# Altium PCB PCB1old.PcbDoc
Units mil, origin at the board's own origin, x right, y up, seen from the top; angles counter-clockwise.
Board outline 6000 x 4000 mil, 2 copper layers (Top Layer, Bottom Layer); 11 components, 71 nets, 147 pads, 0 vias.
Unrouted connection lines stored in the file: 7.
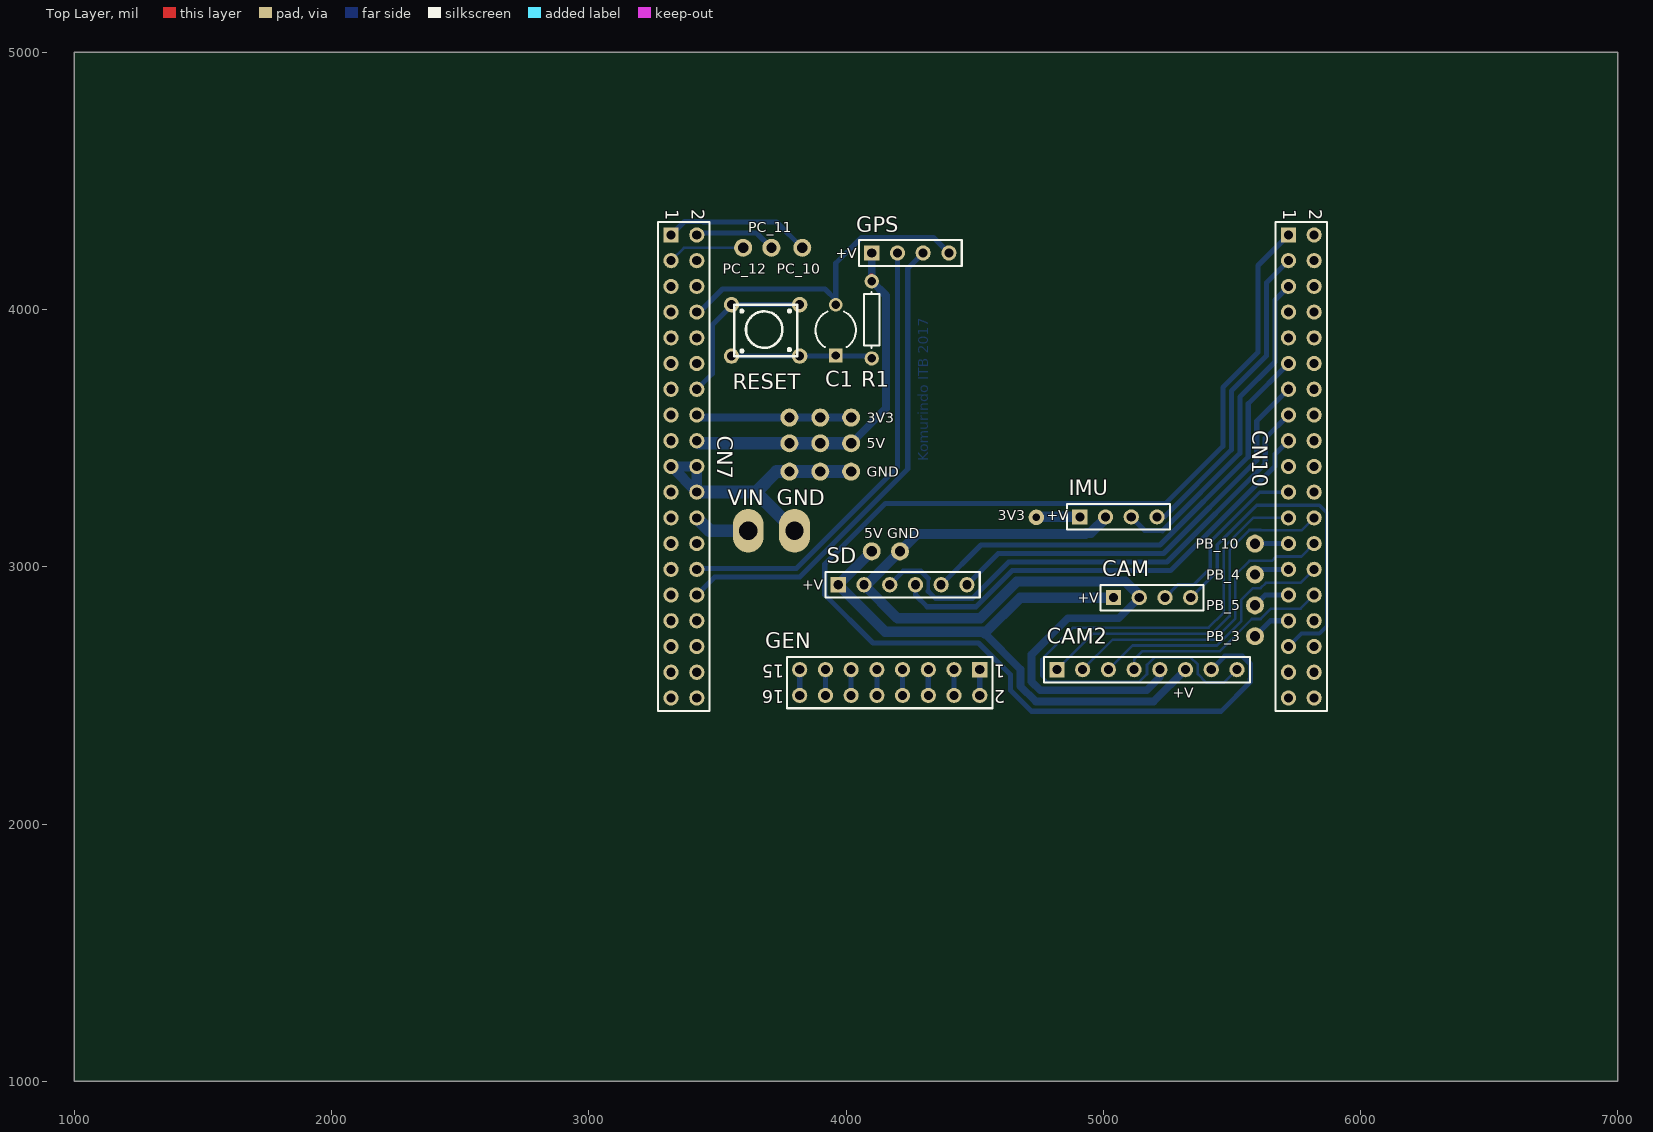
[diagram p0: Top Layer view]
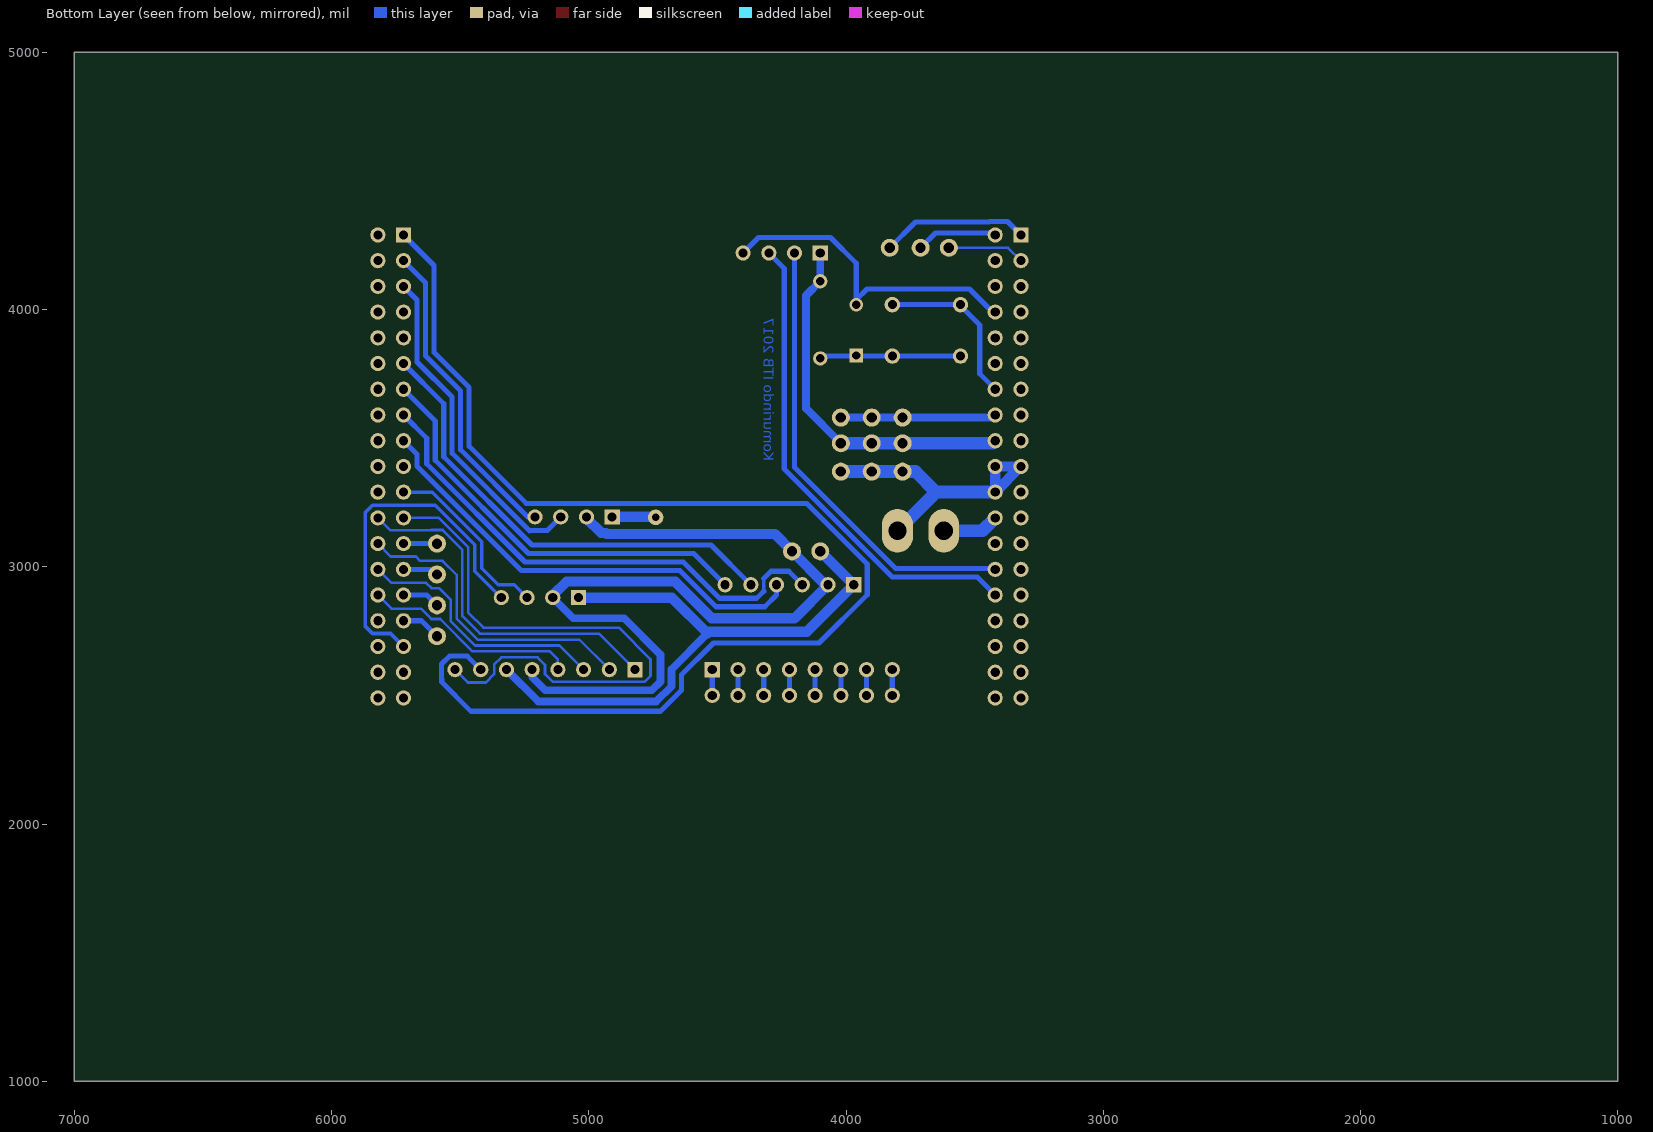
[diagram p1: Bottom Layer view, seen from below]

## Layer stack, top to bottom
Top Solder: solder mask 0.4, Solder Resist, Dk 3.5
Top Layer: signal copper 1.4
Dielectric 1: dielectric 12.6, FR-4, Dk 4.8
Bottom Layer: signal copper 1.4
Bottom Solder: solder mask 0.4, Solder Resist, Dk 3.5

## Board outline
1000,1000 7000,1000 7000,5000 1000,5000

## Design rules (kind name [scope] priority, off if disabled: settings)
Clearance [All] p1: gap=13
PolygonConnect [All] p1: connectstyle=Relief reliefconductorwidth=10 reliefentries=4 polygonreliefangle="90 Angle" airgapwidth=10
RoomDefinition Sheet1 [InComponentClass('Sheet1')] p1: confinementstyle=ConfineIn formatcopy=TRUE lockcomponents=FALSE outline 3190,2390 5940,2390 5940,4430 3190,4430
RoutingVias [All] p1: holewidth=28 width=50 viastyle="Through Hole" minholewidth=28 minwidth=50 maxholewidth=28 maxwidth=50
SolderMaskExpansion [All] p1: expansion=4
Width [All] p1: maxlimit=50 minlimit=10 preferedwidth=20 minimp=50.000000 maximp=50.000000 favimp=50.000000
30 further rules are at their usual default settings.

## Components (designator, comment, footprint, x,y, rotation, side; value= is the part's Value field where it differs from the comment)
C1 "Cap2" CAPR5-4X5 3960,3920 r90 top
CAM "Header 4" HDR1X4 5040,2880 r0 top
CAM2 "Header 8" HDR1X8 4820,2600 r0 top
CN7 "Header 19X2" HDR2X19 3320,4290 r270 top
CN10 "Header 19X2" HDR2X19 5720,4290 r270 top
GEN "Header 8X2" HDR2X8 4520,2600 r180 top
GPS "Header 4" HDR1X4 4100,4220 r0 top
IMU "Header 4" HDR1X4 4909,3194 r0 top
R1 "Res1" AXIAL-0.3 4100,3960 r90 top
RESET "pushbutton" pushbutton 4120,3920 r0 top
SD "Header 6" HDR1X6 3970,2930 r0 top

## Footprints (in the part's own frame and the unit in brackets; to place one, negate y for a bottom-side part, rotate by r counter-clockwise, add the part's x,y. Pads: shape width x height; smd on the part's side, far side on the other; paste and mask are expansions set on the pad)
AXIAL-0.3 [mm] "Axial Device, Thru-Hole; 2 Leads; 0.3 in Pin Spacing"
  round 1.4 hole 0.85: 1(-3.81,0) 2(3.81,0)
  silkscreen extent -2.77,-0.76 2.77,0.76
CAPR5-4X5 [mm] "Capacitor; 2 Leads"
  rect 1.35x1.35 hole 0.8: 1(-2.5,0)
  round 1.35 hole 0.8: 2(2.5,0)
  silkscreen extent -1.69,-2 1.82,2
HDR1X4 [mm] "Connector; Header; 4 Position"
  rect 1.5x1.5 hole 0.9: 1(0,0)
  round 1.5 hole 0.9: 2(2.54,0) 3(5.08,0) 4(7.62,0)
  silkscreen extent -1.27,-1.27 8.89,1.27
HDR1X6 [mm] "Connector; Header; 6 Position"
  rect 1.5x1.5 hole 0.9: 1(0,0)
  round 1.5 hole 0.9: 2(2.54,0) 3(5.08,0) 4(7.62,0) 5(10.16,0) 6(12.7,0)
  silkscreen extent -1.27,-1.27 13.97,1.27
HDR1X8 [mm] "Connector; Header; 8 Position"
  rect 1.5x1.5 hole 0.9: 1(0,0)
  round 1.5 hole 0.9: 2(2.54,0) 3(5.08,0) 4(7.62,0) 5(10.16,0) 6(12.7,0) 7(15.24,0) 8(17.78,0)
  silkscreen extent -1.27,-1.27 19.05,1.27
HDR2X8 [mm] "Connector; Header; 8x2 Position"
  rect 1.5x1.5 hole 0.9: 1(0,0)
  round 1.5 hole 0.9: 2(0,2.54) 3(2.54,0) 4(2.54,2.54) 5(5.08,0) 6(5.08,2.54) 7(7.62,0) 8(7.62,2.54) 9(10.16,0) 10(10.16,2.54) 11(12.7,0) 12(12.7,2.54) 13(15.24,0) 14(15.24,2.54) 15(17.78,0) 16(17.78,2.54)
  silkscreen extent -1.27,-1.27 19.05,3.81
HDR2X19 [mm] "Connector; Header; 19x2 Position"
  rect 1.5x1.5 hole 0.9: 1(0,0)
  round 1.5 hole 0.9: 2(0,2.54) 3(2.54,0) 4(2.54,2.54) 5(5.08,0) 6(5.08,2.54) 7(7.62,0) 8(7.62,2.54) 9(10.16,0) 10(10.16,2.54) 11(12.7,0) 12(12.7,2.54) 13(15.24,0) 14(15.24,2.54) 15(17.78,0) 16(17.78,2.54) 17(20.32,0) 18(20.32,2.54) 19(22.86,0) 20(22.86,2.54) 21(25.4,0) 22(25.4,2.54) 23(27.94,0) 24(27.94,2.54) 25(30.48,0) 26(30.48,2.54) 27(33.02,0) 28(33.02,2.54) 29(35.56,0) 30(35.56,2.54) 31(38.1,0) 32(38.1,2.54) 33(40.64,0) 34(40.64,2.54) 35(43.18,0) 36(43.18,2.54) 37(45.72,0) 38(45.72,2.54)
  silkscreen extent -1.27,-1.27 46.99,3.81
pushbutton [mil]
  round 60 hole 35: 1(-565,-101) 1(-300,-101) 2(-565,99) 2(-300,99)
  silkscreen extent -555,-101 -310,99

## Part data
C1: "Capacitor"
CAM GPS IMU: "Header, 4-Pin"
CAM2: "Header, 8-Pin"
CN7 CN10: "Header, 19-Pin, Dual row"
GEN: "Header, 8-Pin, Dual row"
R1: "Resistor"
SD: "Header, 6-Pin"

## Free pads (board coordinates)
  oval 120x170 hole 70: 0(3800,3140) 1(3620,3140)
  round 70 hole 40: 2(3900,3480) 3(3900,3370) 4(3900,3580) 5(5590,2730) 6(5590,2970) 7(5590,2850) 8(5590,3090) 9(3600,4240) 10(4020,3580) 11(4020,3480) 12(4020,3370) 13(3780,3370) 14(3780,3480) 15(3780,3580) 18(4100,3060) 19(4210,3060) 22(3710,4240) 23(3830,4240)
  round 60 hole 30: 21(4740,3192)

## Nets (pads, with @x,y where several pads share a name; then routed paths per layer and width w, separated by ;. In a path a pad name is that pad's centre, name@x,y a point inside that pad or via, vN(x,y) a via of type N, cw(c..) or ccw(c..) an arc to the next point about the centre after c; other vN are vias at no path point)
3V3: CN7.16 pad.4 pad.10 pad.15 | length 590
  Bottom Layer w30: CN7.16@3430,3580 pad.4 pad.10
5V: CAM2.6 CAM.1 CN7.18 GPS.1 IMU.1 pad.2 pad.11 pad.14 pad.18 pad.21 R1.2 SD.1 | length 3944.1
  Top Layer w20: R1.2@4100,4130 R1.2@4110,4120
  Bottom Layer w30: pad.11 4155.56,3615.56 4155.56,4054.44 R1.2 ; R1.2@4100,4130 GPS.1 ; 4538.36,2741.64 4678,2602 4678,2535.74 4737.27,2476.47 5196.47,2476.47 CAM2.6
  Bottom Layer w40: pad.18 SD.1 4153,2747 4543.72,2747 ; 4538.36,2741.64 4676.72,2880 CAM.1 ; pad.21@4742,3194 IMU.1
  Bottom Layer w50: CN7.18@3430,3480 pad.2 pad.11
AGND: CN10.32
AVDD: CN10.7
BOOT0: CN7.7
E5V: CN7.6 | length 4.9
  Bottom Layer w30: CN7.6 CN7.6@3424.85,4090
GND: C1.2 CAM2.5 CAM.2 CN7.8 CN7.19 CN7.20 CN7.22 CN10.9 CN10.20 GPS.4 IMU.2 pad.0 pad.3 pad.12 pad.13 pad.19 SD.2 | length 5874.6
  Top Layer w20: CN7.8 CN7.8@3430,3990
  Bottom Layer w20: CN7.8@3430,3990 3520,4080 3918.43,4080 3960,4038.43 3960,4180 4060,4280 4340,4280 GPS.4 ; CAM.2 CAM.2@5140,2889.06
  Bottom Layer w30: SD.2 SD.2@4080,2930 ; CAM.2 5060,2800 4862.43,2800 4721,2658.57 4721,2553.55 4755.08,2519.47 5169.47,2519.47 5220,2570 CAM2.5
  Bottom Layer w40: SD.2 4200,2800 4521.77,2800 4664.29,2942.53 5086.53,2942.53 CAM.2@5140,2889.06 ; SD.2@4080,2930 pad.19 4277.53,3127.53 4930,3127.53 4933.94,3131.47 4952.2,3131.47 5009,3188.28 IMU.2 ; CN7.19 CN7.22 CN7.20 CN7.19
  Bottom Layer w50: CN7.22 3650,3290 ; pad.0 3650,3290 ; pad.12 pad.3 3730,3370 3650,3290
IOREF: CN7.12
NetC1_1: C1.1 R1.1 RESET.1 | length 536
  Bottom Layer w20: RESET.1@3575,3819 3840,3819 R1.1@4111,3819
NetGEN_1: GEN.1 GEN.2 | length 100
  Bottom Layer w20: GEN.2 GEN.1
NetGEN_3: GEN.3 GEN.4 | length 100
  Bottom Layer w20: GEN.4 GEN.3
NetGEN_5: GEN.5 GEN.6 | length 100
  Bottom Layer w20: GEN.6 GEN.5
NetGEN_7: GEN.7 GEN.8 | length 100
  Bottom Layer w20: GEN.8 GEN.7
NetGEN_9: GEN.9 GEN.10 | length 100
  Bottom Layer w20: GEN.10 GEN.9
NetGEN_11: GEN.11 GEN.12 | length 100
  Bottom Layer w20: GEN.12 GEN.11
NetGEN_13: GEN.13 GEN.14 | length 100
  Bottom Layer w20: GEN.14 GEN.13
NetGEN_15: GEN.15 GEN.16 | length 100
  Bottom Layer w20: GEN.16 GEN.15
PA_0: CN7.28 GPS.2 | length 1777.6
  Bottom Layer w20: CN7.28 3423,2993 3806.33,2993 4200,3386.67 GPS.2
PA_1: CN7.30 GPS.3 | length 1887.8
  Bottom Layer w20: CN7.30 3490,2960 3820,2960 4240,3380 4240,4160 GPS.3
PA_2: CN10.35
PA_3: CN10.37
PA_4: CN7.32
PA_5: CN10.11 SD.5 | length 1845.7
  Bottom Layer w20: SD.5@4370,2941.21 SD.5 4524.53,3084.53 5221.07,3084.53 5564,3427.45 5564,3634 CN10.11 CN10.11@5720,3782.72
PA_6: CN10.13 SD.6 | length 1654.6
  Bottom Layer w20: SD.6 4591.53,3051.53 5234.74,3051.53 5597,3413.78 5597,3567 CN10.13
PA_7: CN10.15 SD.3 | length 1997.8
  Bottom Layer w14: 4320,2905 4320,2954.29
  Bottom Layer w20: SD.3 4222.53,2982.53 4291.76,2982.53 4320,2954.29 ; 4320,2905 4347,2878 4347.71,2878 4348.24,2877.47 4491.76,2877.47 4632.81,3018.53 5248.41,3018.53 5630,3400.11 5630,3500 CN10.15
PA_8: CAM2.8 CN10.23 | length 2314.8
  Bottom Layer w10: CAM2.8 5470,2550 5400,2550 5367.53,2582.47 5367.53,2619.69 5339.21,2648 5199.11,2648 5170,2618.89 5170,2582.79 5139.69,2552.47 4783.02,2552.47 4760,2575.49 4760,2640 4883,2763 5410,2763 5468,2821 5468,3075.48 5582.52,3190 CN10.23
PA_9: CAM.3 CN10.21 | length 710.1
  Bottom Layer w14: CAM.3 5290,2930 5351.82,2930 5416,2994.18 5416,3097.02 5608.98,3290 CN10.21
PA_10: CAM.4 CN10.33 | length 1374.2
  Bottom Layer w14: CAM.4 5443,2983 5443,3085.84 5596.69,3239.53 5840.52,3239.53 5869.53,3210.51 5869.53,2769.49 5840.52,2740.47 5770.47,2740.47 CN10.33
PA_11: CN10.14
PA_12: CN10.12
PA_14: CN7.15
PA_15: CN7.17
PB_0: CN7.34
PB_1: CAM2.1 CN10.24 | length 1405.8
  Bottom Layer w10: CAM2.1@4830,2600 CAM2.1 4960,2740 5422.82,2740 5491,2808.18 5491,3065.95 5568.05,3143 5611.95,3143 5612.48,3142.47 5772.47,3142.47 CN10.24
PB_2: CN10.22
PB_3: CN10.31 pad.5 | length 154.9
  Bottom Layer w20: pad.5 5650,2790 CN10.31
PB_4: CN10.27 pad.6 | length 138.3
  Bottom Layer w20: pad.6 5610,2990 CN10.27
PB_5: CN10.29 pad.7 | length 146.6
  Bottom Layer w20: pad.7 5630,2890 CN10.29
PB_6: CN10.17 SD.4 | length 1803.5
  Bottom Layer w20: SD.4 4270,2890 4315.53,2844.47 4505.43,2844.47 4646.48,2985.53 5262.08,2985.53 5667.47,3390.92 5667.47,3437.47 CN10.17
PB_7: CN7.21
PB_8: CN10.3 IMU.4 | length 1224.2
  Bottom Layer w20: IMU.4 5237.21,3194 5498,3454.79 5498,3683.53 5634.47,3820 5634.47,4104.47 CN10.3
PB_9: CN10.5 IMU.3 | length 1296.2
  Bottom Layer w20: IMU.3 5161.53,3141.47 5228.65,3141.47 5230,3140.12 5531,3441.12 5531,3660 5667.47,3796.47 5667.47,4037.47 CN10.5
PB_10: CN10.25 pad.8 | length 130
  Bottom Layer w20: pad.8 CN10.25
PB_12: CN10.16
PB_13: CAM2.4 CN10.30 | length 843.6
  Bottom Layer w10: CAM2.4 5120,2640 5151,2671 5451.4,2671 5577.4,2797 5611.95,2797 5652.48,2837.53 5767.53,2837.53 CN10.30
PB_14: CAM2.3 CN10.28 | length 1020.1
  Bottom Layer w10: CAM2.3@5020,2610 CAM2.3 5114,2694 5441.88,2694 5537,2789.12 5537,2871.95 5582.05,2917 5611.95,2917 5632.48,2937.53 5767.53,2937.53 CN10.28
PB_15: CAM2.2 CN10.26 | length 1202.7
  Bottom Layer w10: CAM2.2 5037,2717 5432.35,2717 5514,2798.65 5514,2968.95 5568.05,3023 5655.52,3023 5672.52,3040 5770,3040 CN10.26
PC_0: CN7.38
PC_1: CN7.36
PC_2: CN7.35
PC_3: CN7.37
PC_4: CN10.34
PC_5: CN10.6
PC_6: CN10.4
PC_7: CN10.19
PC_8: CN10.2
PC_9: CAM2.7 CN10.1 | length 4965.2
  Bottom Layer w20: CAM2.7 5472.53,2652.53 5541.76,2652.53 5572.53,2621.76 5572.53,2564.39 5571.53,2563.39 5571.53,2551.53 5458.47,2438.47 4721.53,2438.47 4640,2520 4640,2580 4580,2640 4579.19,2640 4515.19,2704 4104.42,2704 3917.47,2890.95 3917.47,3010.8 4153.2,3246.53 5243.07,3246.53 5465,3468.46 5465,3697.2 5601.47,3833.67 5601.47,4171.47 CN10.1
PC_10: CN7.1 pad.23 | length 574.2
  Bottom Layer w20: CN7.1 3372.53,4342.53 3441.76,4342.53 3444.29,4340 3730,4340 pad.23
PC_11: CN7.2 pad.22 | length 322
  Bottom Layer w20: CN7.2 3420,4298 3652,4298 pad.22
PC_12: CN7.3 pad.9 | length 300.7
  Bottom Layer w10: CN7.3 3370,4240 pad.9
PC_13: CN7.23
PC_14: CN7.25
PC_15: CN7.27
PD_2: CN7.4
PH_0: CN7.29
PH_1: CN7.31
RESET: CN7.13 CN7.14 RESET.2 | length 667.6
  Bottom Layer w20: CN7.14 3480,3750 3480,3940 3559,4019 RESET.2@3840,4019
U5V: CN10.8
VBAT: CN7.33
VDD: CN7.5
VIN: CN7.24 pad.1 | length 220.7
  Bottom Layer w50: CN7.24 3470,3140 pad.1
pads on no net: CN7.9 CN7.10 CN7.11 CN7.26 CN10.10 CN10.18 CN10.36 CN10.38

## Other copper
Bottom Layer:
  text "Komurindo ITB 2017" at 4320,3410 h40 r90

## Silkscreen, mask and mechanical layers (free items; w line width, h text height)
Top Overlay:
  text "PC_11" at 3620,4300 h40
  text "+V" at 3960,4200 h40
  text "PC_12" at 3520,4140 h40
  text "PC_10" at 3730,4140 h40
  text "3V3" at 4080,3560 h40
  text "5V" at 4080,3460 h40
  text "GND" at 4080,3350 h40
  text "VIN" at 3540,3240 h60
  text "GND" at 3730,3240 h60
  text "3V3" at 4590,3180 h40
  text "+V" at 4780,3180 h40
  text "5V" at 4070,3110 h40
  text "GND" at 4160,3110 h40
  text "PB_10" at 5360,3070 h40
  text "PB_4" at 5400,2950 h40
  text "+V" at 3830,2910 h40
  text "+V" at 4900,2860 h40
  text "PB_5" at 5400,2830 h40
  text "PB_3" at 5400,2710 h40
  text "+V" at 5270,2490 h40

## Text inside footprints (layer, text, board x,y; h text height)
CN7: Top Overlay "2" at 3400,4390 h50 r270; Top Overlay "1" at 3300,4390 h50 r270
CN10: Top Overlay "2" at 5800,4390 h50 r270; Top Overlay "1" at 5700,4390 h50 r270
GEN: Top Overlay "2" at 4620,2520 h50 r180; Top Overlay "1" at 4620,2620 h50 r180; Top Overlay "15" at 3760,2620 h50 r180; Top Overlay "16" at 3760,2520 h50 r180